# Altium PCB LT-CHARGE+.PcbDoc
Units mm, origin at the board's own origin, x right, y up, seen from the top; angles counter-clockwise.
Board outline 21 x 36.55 mm, 2 copper layers (Top Layer, Bottom Layer); 28 components, 19 nets, 92 pads, 49 vias.
Unrouted connection lines stored in the file: 49.
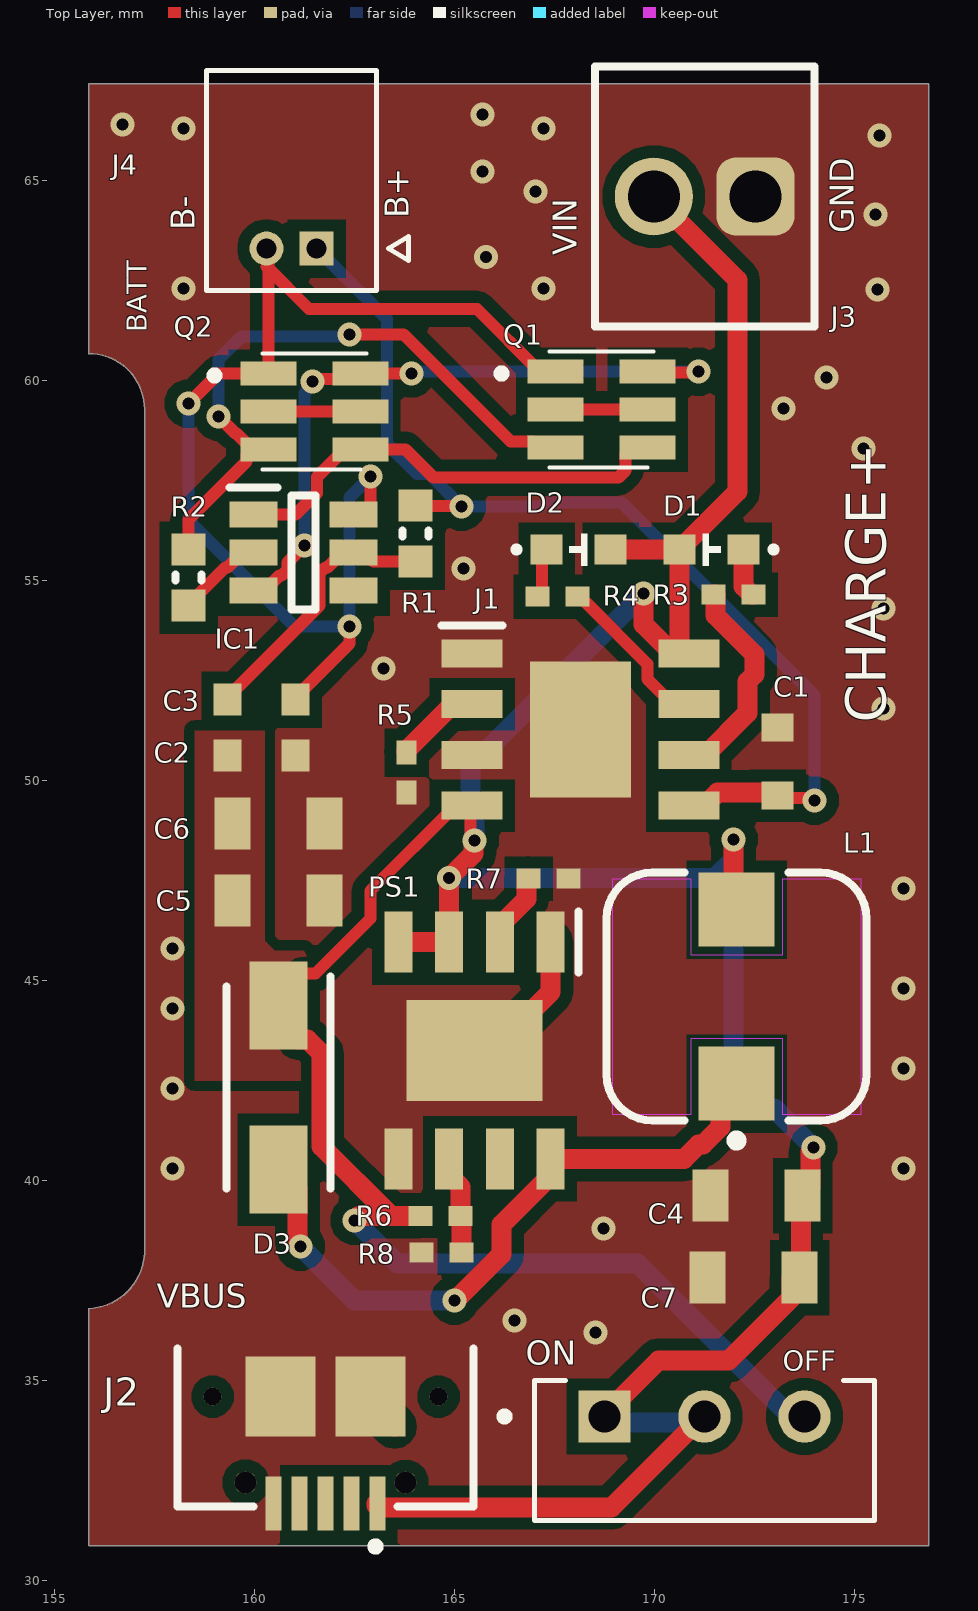
[diagram p0: Top Layer view]
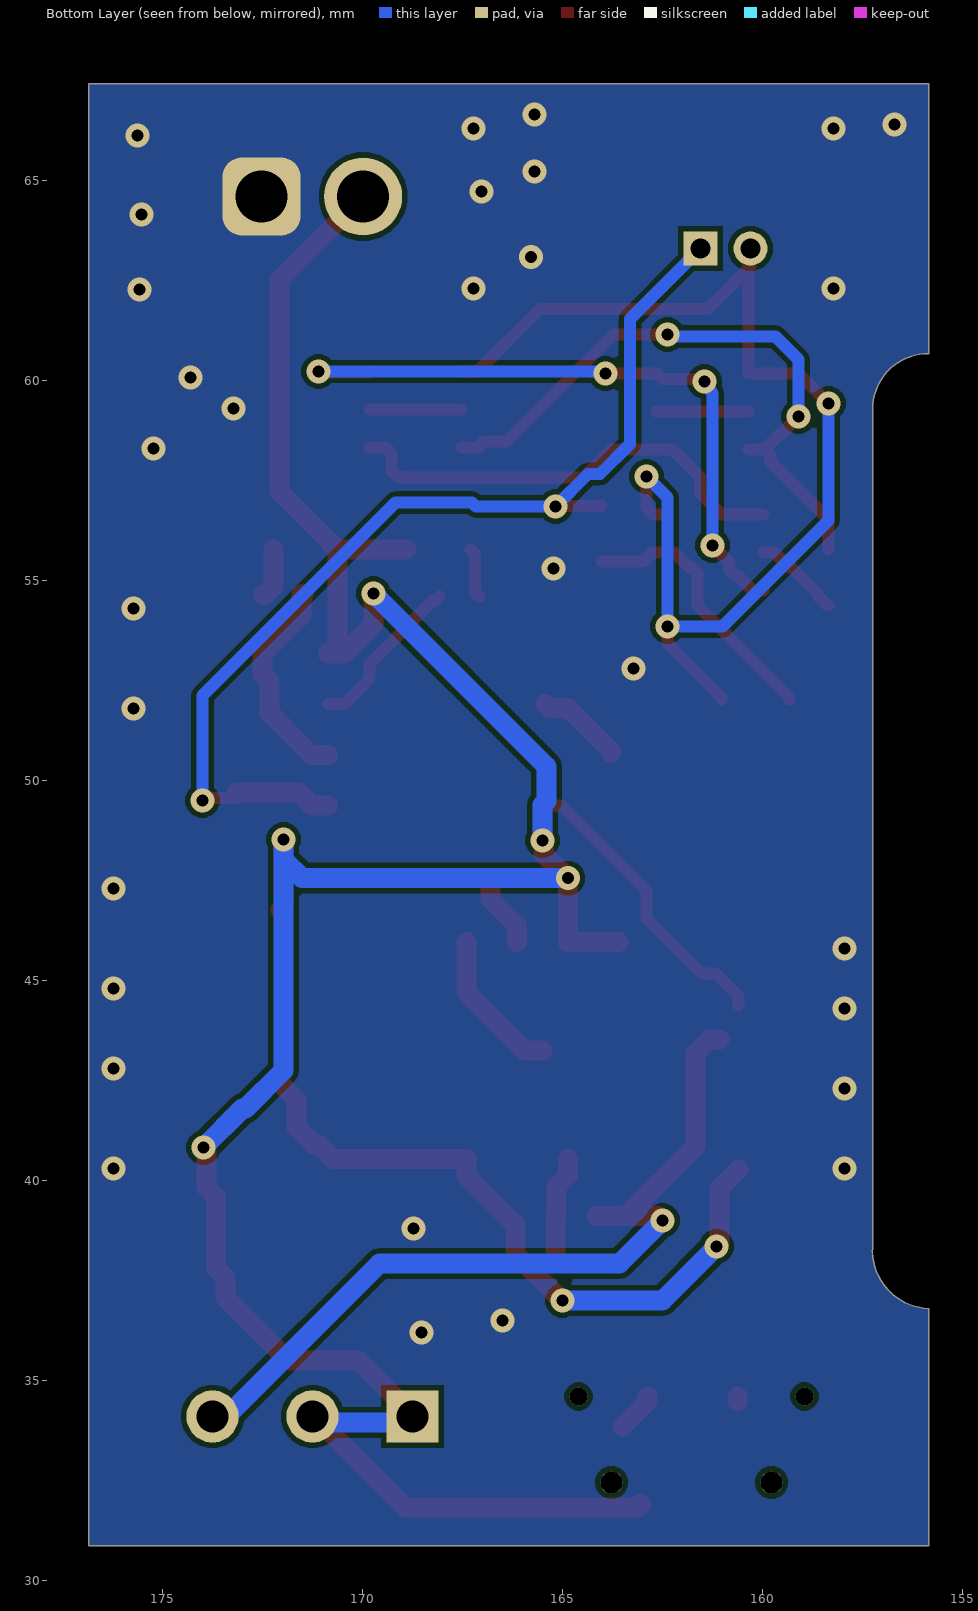
[diagram p1: Bottom Layer view, seen from below]
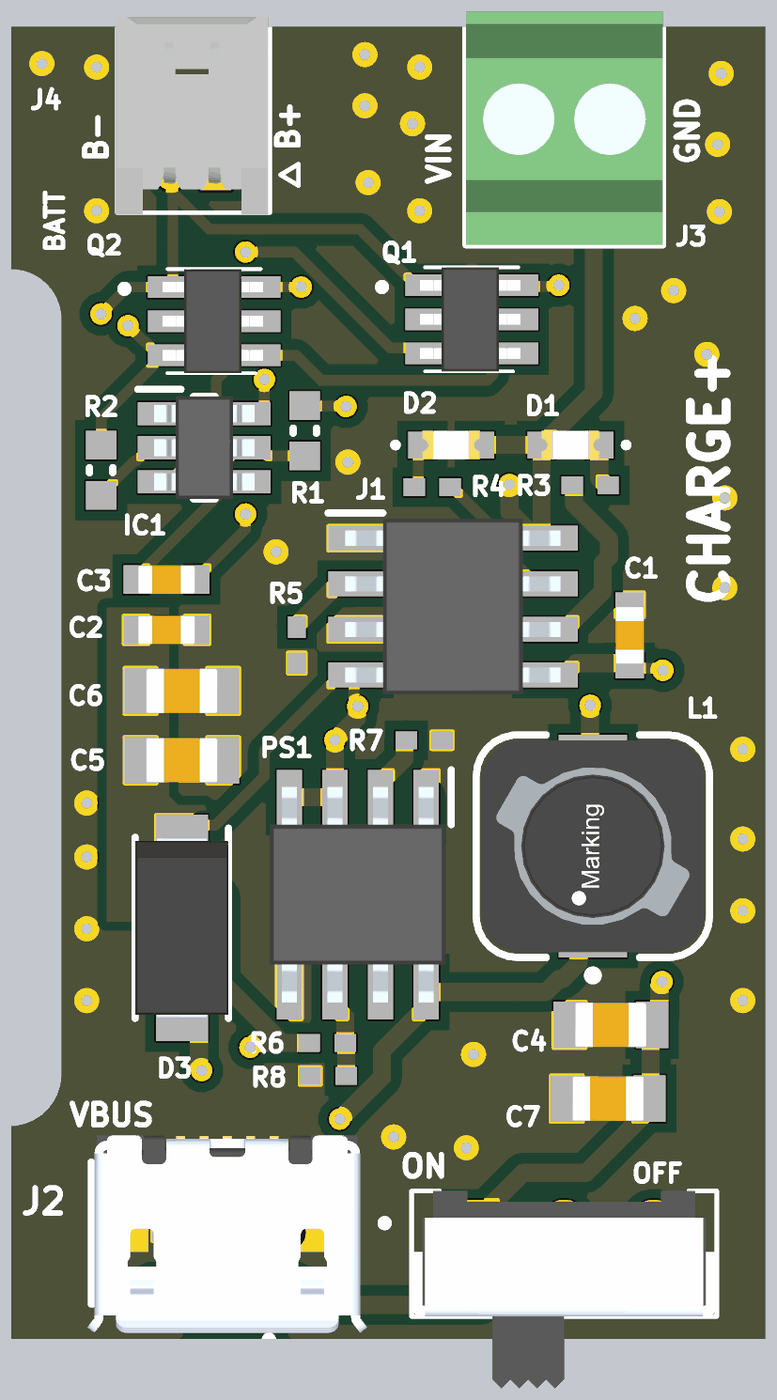
[diagram p2: 3D render of the assembled board from above, using the file's embedded part models]

## Layer stack, top to bottom
Top Solder: solder mask 0.0102, Solder Resist, Dk 3.5
Top Layer: signal copper 0.035
Dielectric 1: dielectric 0.32, FR-4, Dk 4.8
Bottom Layer: signal copper 0.035
Bottom Solder: solder mask 0.0102, Solder Resist, Dk 3.5

## Board outline
155.85,60.675 cw(c155.85,59.275) 157.25,59.275 157.25,38.325 cw(c155.788,38.262) 155.85,36.8 155.85,30.875 176.85,30.875 176.85,67.425 155.85,67.425

## Design rules (kind name [scope] priority, off if disabled: settings)
Clearance Clearance_1 [InNamedPolygon('NONET_L01_P024')] p1: gap=0.5 ignorepadtopadclearanceinfootprint=FALSE
Clearance [InNamedPolygon('+5V_L01_P009')] p2: gap=0.254 ignorepadtopadclearanceinfootprint=FALSE except(0: Arc-Hole Track-Hole SMDPad-Hole THPad-Hole Via-Hole Fill-Hole Poly-Hole Region-Hole Text-Hole)
Clearance GND_L01_P023 [InNamedPolygon('GND_L01_P023')] p3: gap=0.3 ignorepadtopadclearanceinfootprint=FALSE
Clearance "CLEARCE GENERAL" [All] p4: gap=0.127 ignorepadtopadclearanceinfootprint=FALSE
HoleToHoleClearance [All] p1: gap=0.01 allowstackedmicrovias=TRUE
MinimumSolderMaskSliver [All] p1: minsoldermaskwidth=0.05
PlaneClearance [All] p1: clearance=0.108
PlaneConnect [All] p1: planeconnectstyle=Direct reliefexpansion=0.508 reliefentries=4 reliefconductorwidth=0.254 reliefairgap=0.254
PolygonConnect [All] p1: connectstyle=Direct reliefconductorwidth=0.254 reliefentries=4 polygonreliefangle="90 Angle" airgapwidth=0.254
RoutingVias [All] p1: holewidth=0.3 width=0.6 viastyle="Through Hole" minholewidth=0.05 minwidth=0.05 maxholewidth=0.4 maxwidth=0.6
SilkToSilkClearance [All] p1: silktosilkclearance=0.05
SilkToSolderMaskClearance [IsPad] p1: minsilkscreentomaskgap=0.05 clearancetoexposedcopper=TRUE
SolderMaskExpansion [All] p1: expansion=0.05 istentingtop=FALSE
Width [All] p1: maxlimit=1 minlimit=0.254 preferedwidth=0.5
24 further rules are at their usual default settings.

## Components (designator, comment, footprint, x,y, rotation, side; value= is the part's Value field where it differs from the comment)
C1 "10uF" WCAP-CSGP_0603_L1.6W0.8H0.8_WAVE 173.075,50.475 r270 top
C2 "100nF" WCAP-CSGP_0603_L1.6W0.8H0.8_WAVE 160.175,50.625 r180 top
C3 "10uF" WCAP-CSGP_0603_L1.6W0.8H0.8_WAVE 160.175,52.025 r180 top
C4 "22uF" WCAP-CSGP_0805_L2W1.25H0.6_WAVE 172.55,39.625 r0 top
C5 "22uF" WCAP-CSGP_0805_L2W1.25H0.6_WAVE 160.6,46.996 r180 top
C6 "22uF" WCAP-CSGP_0805_L2W1.25H0.6_WAVE 160.6,48.925 r180 top
C7 "22uF" WCAP-CSGP_0805_L2W1.25H0.6_WAVE 172.475,37.571 r0 top
D1 "Green, 3.1V, 120°" WL-SMCD_0603 171.425,55.775 r180 top
D2 "Super Red, 2V, 140°" WL-SMCD_0603 168.1,55.775 r0 top
D3 "SS54" DIOM5026X262N 160.6,42.325 r270 top
IC1 "DW01A-G" SOT95P280X135-6N 161.225,55.7 r0 top
J1 "TP4056" SOIC127P600X175-9N 168.15,51.275 r0 top
J2 "USB3090-XX-X_REVE" GCT_USB3080-XX-01-A_REVE 161.775,34.6 r180 top
J3 "691412220002M" 691210910002 171.255,64.6 r180 top
J4 "691412220002M" MOLEX_530480210 161.55,63.3 r180 top
L1 "inductor33uh" WE-PD_6050R 172.05,44.6 r90 top
OFF "EG1270" SW_EG1270 171.25,34.1 r0 top (schematic designator S1)
PS1 "FP6298XR-G1" SOIC127P600X175-9N 165.5,43.25 r270 top
Q1 "FS8205" FS8205 168.025,59.275 r0 top
Q2 "FS8205" FS8205 160.85,59.225 r0 top
R1 "ERA-3ARW103V" 0603L 164.025,56.175 r90 top value=10.0k
R2 "ERA-3ARW103V" 0603L 158.35,55.075 r270 top value=10.0k
R3 "CRCW0402510RJNED" 0402L 171.975,54.65 r0 top value=1K5
R4 "CRCW0402510RJNED" 0402L 167.575,54.6 r180 top value=1K5
R5 "CRCW0402510RJNED" 0402L 163.8,50.2 r90 top value=510
R6 "CRCW0402510RJNED" 0402L 164.65,39.116 r180 top value=75k
R7 "CRCW0402510RJNED" 0402L 167.35,47.55 r180 top value=27k
R8 "CRCW0402510RJNED" 0402L 164.675,38.2 r0 top value=10k

## Footprints (in the part's own frame and the unit in brackets; to place one, negate y for a bottom-side part, rotate by r counter-clockwise, add the part's x,y. Pads: shape width x height; smd on the part's side, far side on the other; paste and mask are expansions set on the pad)
0402L [mm]
  rect 0.6x0.5 smd: 1(-0.5,0) 2(0.5,0)
  body extent -0.55,-0.3 0.55,0.3, height 0.6
0603L [mm]
  rect 0.8x0.85 smd: 1(-0.7,0) 2(0.7,0)
  silkscreen extent -0.07,-0.32 0.07,0.32, body extent -0.87,-0.47 0.87,0.47, height 1
691210910002 [mm] "2,54mm - modular - green - Horizontal wire entry - Cage clamp - 0,8mm2 wires - 02p"
  rrect50% 1.95x1.95 hole 1.3: 1(-1.27,0)
  round 1.95 hole 1.3: 2(1.27,0)
  silkscreen extent -2.74,-3.25 2.74,3.25, body extent -2.74,-3.25 2.74,3.25, height 8.55
DIOM5026X262N [mm]
  rect 2.2x1.45 smd: 1(-2.05,0) 2(2.05,0)
  silkscreen extent -2.78,-1.3 2.52,1.3, body extent -2.52,-1.3 2.52,1.3, height 2.62
FS8205 [mm]
  rect 1.4x0.6 smd: 1(-0.5,0.95) 2(-0.5,0) 3(-0.5,-0.95) 4(1.8,0.95) 5(1.8,0) 6(1.8,-0.95)
  silkscreen extent -1.95,-1.45 1.95,1.45, body extent -0.79,-1.45 2.01,1.45, height 1.46
GCT_USB3080-XX-01-A_REVE [mm]
  rect 0.4x1.35 smd: 1(-1.3,2.68) 2(-0.65,2.68) 3(0,2.68) 4(0.65,2.68) 5(1.3,2.68)
  rect 1.75x2 smd: 8(-1.125,0) 9(1.125,0)
  round 0.45 hole 0.45 unplated: ""(-2.825,0) ""(2.825,0)
  round 0.55 hole 0.55 unplated: ""(-2,2.15) ""(2,2.15)
  silkscreen extent -3.7,-1.2 3.7,3.85, body extent -3.99,-1.94 3.81,3.56, height 2.71
MOLEX_530480210 [mm]
  rect 0.85x0.85 / inner round 0.85 / far side rect 0.85x0.85 hole 0.5 mask+0.076: 1(0,0)
  round 0.85 hole 0.5 mask+0.076: 2(1.25,0)
  silkscreen extent -2.3,-4.45 2.75,1.05, body extent -1.46,-4.4 2.79,1.1, height 3.63
SOIC127P600X175-9N [mm]
  rect 1.525x0.7 smd: 1(-2.712,1.905) 2(-2.712,0.635) 3(-2.712,-0.635) 4(-2.712,-1.905) 5(2.712,-1.905) 6(2.712,-0.635) 7(2.712,0.635) 8(2.712,1.905)
  rect 2.513x3.402 smd: 9(0,0)
  silkscreen extent -3.47,2.61 -1.95,2.61, body extent -3,-2.45 3,2.45, height 1.75
SOT95P280X135-6N [mm]
  rect 1.2x0.65 smd: 1(-1.25,0.95) 2(-1.25,0) 3(-1.25,-0.95) 4(1.25,-0.95) 5(1.25,0) 6(1.25,0.95)
  silkscreen extent -1.85,-1.43 0.3,1.63, body extent -1.4,-1.43 1.4,1.43, height 1.35
SW_EG1270 [mm]
  rect 1.308x1.308 / inner round 1.308 / far side rect 1.308x1.308 hole 0.8: 1(-2.5,0)
  round 1.308 hole 0.8: 2(0,0) 3(2.5,0)
  silkscreen extent -5.1,-2.6 4.25,0.9, body extent -4.25,-4.6 4.25,0.9, height 5.1
WCAP-CSGP_0603_L1.6W0.8H0.8_WAVE [mm] "Ceramic Capacitors, 0603, body 1.6x0.8mm"
  rect 0.7x0.8 smd: 1(-0.85,0) 2(0.85,0)
  body extent -0.8,-0.4 0.8,0.4, height 0.8
WCAP-CSGP_0805_L2W1.25H0.6_WAVE [mm] "Ceramic Capacitors, body 2x1.25mm"
  rect 0.9x1.3 smd: 1(-1.15,0) 2(1.15,0)
  body extent -1,-0.62 1,0.63, height 0.6
WE-PD_6050R [mm] "SMT Shielded Power Inductor, 2-leads, body 5.9x6.2mm"
  rect 1.85x1.9 smd: 1(-2.175,0) 2(2.175,0)
  Top Layer keep-out region: -2.95,-3.1 -2.95,-1.15 -1.05,-1.15 -1.05,1.15 -2.95,1.15 -2.95,3.1 2.95,3.1 2.95,1.15 1.05,1.15 1.05,-1.15 2.95,-1.15 2.95,-3.1
  silkscreen extent -3.72,-3.25 3.1,3.25, body extent -2.95,-3.1 2.95,3.1, height 4.9
WL-SMCD_0603 [mm] "SMD Mono-color Chip LED, body 1.6x0.8mm"
  rect 0.8x0.75 smd: 1(-0.8,0) 2(0.8,0)
  silkscreen extent -1.63,-0.4 0.22,0.4, body extent -0.8,-0.4 0.8,0.4, height 0.42

## Part data
C1 C2 C3: library part C, "WCAP-CSGP Multilayer Ceramic Chip Capacitor, General Purpose, size 0201, NP0 Class I, 100pF, 25VDC", Capacitance=100pF, Capacitance Tolerance=+/-5%, Case/Size Code=0201, Insulation Resistance=10GΩ, Manufacturer="Wurth Elektronik", Manufacturer Part Number=885012004001, Operating Temperature Max=125°C, Operating Temperature Min=-55°C, Rated Voltage (DC)=25V, Category="Multilayer Ceramic Chip Capacitors", Ceramic Type="NP0 Class I", ComponentLink1Description="Website Link", ComponentLink1URL=https://www.we-online.com/redexpert/article/885012004001?ad, ComponentLink2Description="Datasheet Link", ComponentLink2URL=https://www.we-online.com/redexpert/spec/885012004001?ad, Height=0.3mm, Length=0.6mm, Match Code=WCAP-CSGP, Mount="Surface Mount", Packaging="Tape and Reel", Q Factor=1000, Technical Reference=NP00201101J025DFCT10000, Width=0.3mm
C4 C5 C6 C7: library part C-08, "WCAP-CSGP Multilayer Ceramic Chip Capacitor, General Purpose, size 0201, NP0 Class I, 10pF, 50VDC", Capacitance=10pF, Capacitance Tolerance=+/-5%, Case/Size Code=0201, Insulation Resistance=10GΩ, Manufacturer="Wurth Elektronik", Manufacturer Part Number=885012004011, Operating Temperature Max=125°C, Operating Temperature Min=-55°C, Rated Voltage (DC)=50V, Category="Multilayer Ceramic Chip Capacitors", Ceramic Type="NP0 Class I", ComponentLink1Description="Website Link", ComponentLink1URL=https://www.we-online.com/redexpert/article/885012004011?ad, ComponentLink2Description="Datasheet Link", ComponentLink2URL=https://www.we-online.com/redexpert/spec/885012004011?ad, Height=0.3mm, Length=0.6mm, Match Code=WCAP-CSGP, Mount="Surface Mount", Packaging="Tape and Reel", Q Factor=600, Technical Reference=NP00201100J050DFCT10000, Width=0.3mm
D1: library part led-green, "WL-SMSW Mono-color Side View Waterclear, size 3014, Green, 3.1V, 120°", Case/Size Code=3014, Emitting Color=Green, Forward Voltage=3.1V, Manufacturer="Wurth Elektronik", Manufacturer Part Number=155301GS73100, Operating Temperature Max=85°C, Operating Temperature Min=-40°C, Category="Signal LEDs", Chip Technology=InGaN, ComponentLink1Description="Website Link", ComponentLink1URL=https://www.we-online.com/redexpert/article/155301GS73100?ad, ComponentLink2Description="Datasheet Link", ComponentLink2URL=https://www.we-online.com/redexpert/spec/155301GS73100?ad, Dominant Wavelength=525nm, Height=1.55mm, Length=3mm, Luminous Intensity=1500mcd, Match Code=WL-SMSW, Mount="Surface Mount", Packaging="Tape and Reel", Peak Wavelength=515nm, Viewing Angle=120°, Width=1.38mm
D2: library part led-red, "WL-SMCD Mono-color Chip LED Diffused, SMT, size 0603, Super Red, 2V, 140°", Case/Size Code=0603, Emitting Color="Super Red", Forward Voltage=2V, Manufacturer="Wurth Elektronik", Manufacturer Part Number=150060SS55040, Operating Temperature Max=85°C, Operating Temperature Min=-40°C, Category="Signal LEDs", Chip Technology=AlInGaP, ComponentLink1Description="Website Link", ComponentLink1URL=https://www.we-online.com/redexpert/article/150060SS55040?ad, ComponentLink2Description="Datasheet Link", ComponentLink2URL=https://www.we-online.com/redexpert/spec/150060SS55040?ad, Dominant Wavelength=630nm, Height=0.4mm, Length=1.6mm, Luminous Intensity=70mcd, Match Code=WL-SMCD, Mount="Surface Mount", Packaging="Tape and Reel", Peak Wavelength=645nm, Viewing Angle=140°, Width=0.8mm
D3: "Schottky Diode", Manufacturer_Name="DIYI Elec Tech", Datasheet Link=https://datasheet.lcsc.com/szlcsc/DIYI-Elec-Tech-SS54_C84165.pdf, Height=2.62mm, Manufacturer_Part_Number=SS54
IC1: "Integrated Circuit", Manufacturer_Name="Fortune Semiconductor Corporation", Datasheet Link=http://acoptex.com/uploads/DW01A.pdf, Height=1.35mm, Manufacturer_Part_Number=DW01A-G
J1: "Connector", Manufacturer_Name="NanJing Top Power", Datasheet Link=https://dlnmh9ip6v2uc.cloudfront.net/datasheets/Prototyping/TP4056.pdf, Height=1.75mm, Manufacturer_Part_Number=TP4056
J2: "Micro USB Receptacle, Type AB, SMT, R/A, Bottom Mount, w/out Peg, w/outer shell stakes", Package=None, Availability=Unavailable, MP=USB3090-XX-X_REVE, Price=None
J3: library part conn, "WR-TBL Series 4122M 45° Entry, THT, pitch 7mm, 2p", Manufacturer="Wurth Elektronik", Operating Temperature Max=120°C, Operating Temperature Min=-30°C, Rated Current=4A, Working Voltage=300V, Application=Screwless, Category="Terminal Blocks", ComponentLink1Description="Website Link", ComponentLink1URL=https://www.we-online.com/redexpert/article/691412220002M?ad, ComponentLink2Description="Datasheet Link", ComponentLink2URL=https://www.we-online.com/redexpert/spec/691412220002M?ad, Manufacturer Part Number=691412220002M, Match Code=WR-TBL, Modularity=No, Mount="Through Hole", Number of Pins=2, Number of Rows=1, Orientation=45°, Packaging=Box, Pitch=7mm
J4: library part header, "WR-TBL Series 4122M 45° Entry, THT, pitch 7mm, 2p", Manufacturer="Wurth Elektronik", Operating Temperature Max=120°C, Operating Temperature Min=-30°C, Rated Current=4A, Working Voltage=300V, Application=Screwless, Category="Terminal Blocks", ComponentLink1Description="Website Link", ComponentLink1URL=https://www.we-online.com/redexpert/article/691412220002M?ad, ComponentLink2Description="Datasheet Link", ComponentLink2URL=https://www.we-online.com/redexpert/spec/691412220002M?ad, Manufacturer Part Number=691412220002M, Match Code=WR-TBL, Modularity=No, Mount="Through Hole", Number of Pins=2, Number of Rows=1, Orientation=45°, Packaging=Box, Pitch=7mm
L1: "33 ÂµH Shielded Drum Core, Wirewound Inductor 3 A 60mOhm Max Nonstandard", Package="Nonstandard Bourns", Availability="Not in stock", Check_prices=https://www.snapeda.com/parts/SRR1260-330M/Bourns/view-part/?ref=eda, MF=Bourns, MP=SRR1260-330M, Price=None, SnapEDA_Link=https://www.snapeda.com/parts/SRR1260-330M/Bourns/view-part/?ref=snap
OFF: "Slide Switch SPDT Through Hole, Right Angle", Package=None, Availability="In Stock", Check_prices=https://www.snapeda.com/parts/EG1270/E-Switch/view-part/?ref=eda, MF=E-Switch, MP=EG1270, Price=None, Purchase-URL=https://pricing.snapeda.com/search/part/EG1270/?ref=eda, SnapEDA_Link=https://www.snapeda.com/parts/EG1270/E-Switch/view-part/?ref=snap
PS1: "Power Supply", Manufacturer_Name="Feeling Technology", Datasheet Link=https://datasheet.lcsc.com/szlcsc/1811141821_Feeling-Tech-FP6298XR-G1_C88319.pdf, Height=1.752mm, Manufacturer_Part_Number=FP6298XR-G1
Q1 Q2: "Dual N-Channel Enhancement Mode Power MOSFET", Package=Package, Availability="Not in stock", Check_prices=https://www.snapeda.com/parts/FS8205/Fortune+Semiconductor/view-part/?ref=eda, MF="Fortune Semiconductor", MP=FS8205, Price=None, SnapEDA_Link=https://www.snapeda.com/parts/FS8205/Fortune+Semiconductor/view-part/?ref=snap
R1: library part RES-10K-0603, "RES, 10.0 k, 0.05%, 0.1 W, AEC-Q200 Grade 0, 0603", Manufacturer=Panasonic, Power_W=100mW, TempCo="10 ppm/C", Tolerance_%=0.05%, Value2=0.1W, Value_Code=10k0, ValueDisplayed=100R, AEC Category=Q200, AEC Grade=0, AEC Qualified=Y, ComponentLink1Description="Datasheet link", ComponentLink1URL=https://industrial.panasonic.com/cdbs/www-data/pdf/RDM0000/AOA0000C307.pdf, CompType=Resistor, MountType=SMT, PackageReference=0603, PartNumber=ERA-3ARW103V, Res_ohm=10k, RoHS=Y, SizeArea_mm2=1.28, SizeAreaWB_mm2=4.68, SizeX_mm=1.6, SizeY_mm=0.8, SizeZ_mm=1, Technology="Thin Film", Value1=0.05%
R2: library part RES-10K-0603, "RES, 10.0 k, 0.05%, 0.1 W, AEC-Q200 Grade 0, 0603", Manufacturer=Panasonic, Power_W=100mW, TempCo="10 ppm/C", Tolerance_%=0.05%, Value2=0.1W, Value_Code=10k0, ValueDisplayed=1k, AEC Category=Q200, AEC Grade=0, AEC Qualified=Y, ComponentLink1Description="Datasheet link", ComponentLink1URL=https://industrial.panasonic.com/cdbs/www-data/pdf/RDM0000/AOA0000C307.pdf, CompType=Resistor, MountType=SMT, PackageReference=0603, PartNumber=ERA-3ARW103V, Res_ohm=10k, RoHS=Y, SizeArea_mm2=1.28, SizeAreaWB_mm2=4.68, SizeX_mm=1.6, SizeY_mm=0.8, SizeZ_mm=1, Technology="Thin Film", Value1=0.05%
R3 R4 R5 R6 R7 R8: "RES, 510, 5%, 0.063 W, 0402", Manufacturer=Vishay-Dale, Power_W=0.063, Supplier Part Number 1=541-510JCT-ND, TempCo="200 ppm/C", Tolerance_%=5, Value1=5%, Value2=0.063W, Value_Code=510R, ValueDisplayed=510, ComponentLink1Description="Datasheet link", ComponentLink1URL=http://www.vishay.com/docs/20035/dcrcwe3.pdf, CompType=Resistor, EIA_Code=E24, LatestRevisionDate=2015-05-27, MountType=SMT, PackageReference=0402, PartNumber=CRCW0402510RJNED, Published=2008-06-26, Publisher="Texas Instruments", Res_ohm=510, RoHS=Y, Supplier 1=Digi-Key, Supplier 2=Mouser, Supplier 3=Farnell, Supplier Part Number 2=71-CRCW0402J-510-E3, Supplier Part Number 3=1570682, SymbolVersion=2009-05-29, Technology="Thick Film", U/M=EA, VDC_V=50

## Via types
v1: diameter 0.6, hole 0.3, Top Layer to Bottom Layer, 49 vias

## Nets (pads, with @x,y where several pads share a name; then routed paths per layer and width w, separated by ;. In a path a pad name is that pad's centre, name@x,y a point inside that pad or via, vN(x,y) a via of type N, cw(c..) or ccw(c..) an arc to the next point about the centre after c; other vN are vias at no path point)
+5V: C2.2 C4.2 C5.2 C6.2 C7.2 D1.2 D2.2 D3.1 J1.4 J1.8 J2.1 J3.2 L1.2 OFF.1 OFF.2 OFF.3 PS1.3 PS1.4 R6.2 | length 96.9
  Top Layer w0.3: D3.1 160.6,44.604 161.175,45.179 161.529,45.179 162.895,46.546 162.895,47.239 165.026,49.37 J1.4 165.438,49.308 165.4,49.27 165.4,48.627 165.5,48.527 v1(165.5,48.5)
  Top Layer w0.5: D3.1@161.075,43.525 161.325,43.525 161.675,43.175 161.675,40.851 163.409,39.116 ; v1(162.5,39) 162.616,39.116 163.409,39.116 ; J2.1@163.05,31.92 163.05,31.875 163.1,31.825 168.925,31.825 OFF.2@171.05,33.95 ; PS1.4 PS1.3 v1(164.865,47.56) 165.481,48.176 165.481,48.481 v1(165.5,48.5) ; R6.2 163.409,39.116 ; OFF.1@168.55,33.95 170.1,35.5 171.855,35.5 173.425,37.07 173.425,37.575 173.663,37.812 173.663,39.588 173.9,39.825 173.9,40.723 173.975,40.798 v1(173.975,40.825) ; D2.2 D1.2 ; v1(169.725,54.675) 169.725,53.905 170.45,53.18 J1.8@170.725,53.18 ; J3.2 172.075,62.51 172.075,57.225 170.775,55.925 170.775,55.9 170.65,55.775 D1.2 ; J1.8 J1.8@170.725,53.18 ; v1(171.975,48.525) 171.975,46.85 L1.2 ; D1.2 170.625,53.28 J1.8@170.725,53.18
  Bottom Layer w0.5: v1(162.5,39) 163.575,37.925 169.575,37.925 OFF.3@173.55,33.95 ; v1(164.865,47.56) 171.508,47.56 171.975,48.027 ; v1(165.5,48.5) 165.5,49.389 165.4,49.489 165.4,50.35 v1(169.725,54.675) ; OFF.1@168.55,33.95 OFF.2@171.05,33.95 ; v1(171.975,48.525) 171.975,48.027 ; v1(173.975,40.825) 173.003,41.797 172.928,41.797 171.975,42.75 171.975,48.027
B+: C1.2 J1.5 J4.1 R1.2 | length 26.2
  Top Layer w0.3: R1.2 164.038,56.862 165.163,56.862 v1(165.175,56.85) ; C1.2 173.143,49.557 173.943,49.557 v1(174,49.5)
  Top Layer w0.5: J1.5 171.275,49.37 171.375,49.47 171.375,49.495 171.58,49.7 C1.2@173.143,49.7
  Bottom Layer w0.3: J4.1 163.313,61.537 163.313,58.412 164.065,57.66 164.365,57.66 v1(165.175,56.85) 167.166,56.85 167.266,56.95 169.175,56.95 174,52.125 v1(174,49.5)
B-: C3.1 IC1.6 J4.2 Q1.1 Q2.1 | length 29.4
  Top Layer w0.3: v1(158.35,59.425) 159.1,60.175 Q2.1 160.35,62.85 160.35,63.25 J4.2 ; 160.3,62.85 161.365,61.785 165.565,61.785 167.125,60.225 Q1.1 ; C3.1 161.025,52.075 162.375,53.425 v1(162.375,53.85) ; IC1.6 162.725,56.65 162.9,56.825 v1(162.9,57.6)
  Bottom Layer w0.3: v1(158.35,59.425) 158.35,56.5 161,53.85 v1(162.375,53.85) 162.375,57.075 v1(162.9,57.6)
GND: C1.1 C2.1 C4.1 C5.1 C6.1 C7.1 J1.1 J1.3 J1.9 J2.5 J2.8 J2.9 J3.1 PS1.1 PS1.5 PS1.9 R5.1 R7.1 R8.1 | length 4.9
  Top Layer w0.5: J2.9@160.625,34.475 J2.9@160.625,34.6 ; J2.8@162.875,34.6 162.875,34.475 J2.8@163.5,33.85 ; PS1.9 165.945,43.25 167.405,44.711 PS1.1
  other v1: 168.525,36.2 166.5,36.5 168.725,38.8 157.95,40.3 176.225,40.3 157.95,42.3 176.225,42.8 157.95,44.3 176.225,44.8 157.95,45.8 176.225,47.3 175.725,51.8 163.225,52.8 175.725,54.3 165.225,55.3 175.225,58.3 173.225,59.3 174.3,60.075 175.575,62.275 158.225,62.3 167.225,62.3 165.79,63.085 175.525,64.15 167.025,64.725 165.7,65.225 175.625,66.125 158.225,66.3 167.225,66.3 156.7,66.4 165.7,66.65
NetC3_2: C3.2 IC1.5 R1.1 | length 6.8
  Top Layer w0.3: C3.2 159.325,52.075 161.625,54.375 161.625,55.179 161.771,55.325 161.825,55.325 162.2,55.7 IC1.5 162.75,55.7 162.975,55.475 R1.1
NetD1_1: D1.1 R3.2 | length 1.3
  Top Layer w0.5: D1.1 172.225,54.85 172.425,54.65 R3.2
NetD2_1: D2.1 R4.2 | length 1.3
  Top Layer w0.3: R4.2 167.087,54.6 167.187,54.7 167.187,55.663 D2.1
NetD3_2: D3.2 L1.1 PS1.8 | length 16.9
  Top Layer w0.5: D3.2 161.075,39.8 161.075,38.425 v1(161.15,38.35) ; v1(165,37) 165.02,37 166.174,38.154 166.174,38.894 167.405,40.126 PS1.8 170.738,40.538 171.1,40.9 171.211,40.9 171.65,41.339 171.65,42.025 L1.1
  Bottom Layer w0.5: v1(161.15,38.35) 162.5,37 v1(165,37)
NetIC1_1: IC1.1 Q1.6 Q2.6 | length 11.6
  Top Layer w0.3: IC1.1 161.025,56.65 161.562,57.188 161.562,57.587 162.25,58.275 Q2.6 163.775,58.275 164.475,57.575 169.099,57.575 169.275,57.751 169.275,58.175 169.425,58.325 Q1.6
NetIC1_2: IC1.2 R2.2 | length 2.2
  Top Layer w0.3: R2.2 158.375,54.375 158.625,54.625 158.625,54.679 159.271,55.325 159.325,55.325 159.7,55.7 IC1.2
NetIC1_3: IC1.3 Q1.4 Q2.4 | length 17.1
  Top Layer w0.3: IC1.3 160.25,54.75 160.625,55.125 160.679,55.125 160.825,55.271 160.825,55.45 v1(161.25,55.875) ; v1(161.45,59.975) 161.507,60.032 162.507,60.032 Q2.4 v1(163.925,60.175) ; Q1.4 169.85,60.2 171.075,60.2 v1(171.1,60.225)
  Bottom Layer w0.3: v1(161.25,55.875) 161.25,59.694 161.45,59.894 v1(161.45,59.975) ; v1(163.925,60.175) 163.975,60.225 v1(171.1,60.225)
NetJ1_2: J1.2 R5.2 | length 2.2
  Top Layer w0.5: R5.2 163.8,50.75 164.86,51.81 165.338,51.81 J1.2
NetJ1_6: J1.6 R3.1 | length 5.4
  Top Layer w0.5: J1.6 171.275,50.64 172.325,51.691 172.325,52.474 172.5,52.649 172.5,53.149 171.525,54.124 171.525,54.65 R3.1
NetJ1_7: J1.7 R4.1 | length 4.1
  Top Layer w0.3: R4.1 168.175,54.5 168.236,54.5 169.825,52.911 169.825,52.534 170.45,51.91 J1.7
NetPS1_2: PS1.2 R7.2 | length 1.9
  Top Layer w0.5: PS1.2 166.135,46.375 166.8,47.039 166.8,47.55 R7.2
NetPS1_6: PS1.6 R6.1 R8.2 | length 2.5
  Top Layer w0.5: PS1.6 164.865,40.126 165.155,39.835 165.155,39.116 165.175,39.116 R8.2
NetQ1_2: Q1.2 Q1.5 | length 2.3
  Top Layer w0.3: Q1.2 Q1.5
NetQ1_3: Q1.3 Q2.3 R2.1 | length 16.1
  Top Layer w0.3: R2.1 158.35,56.525 159.8,57.975 159.8,58.125 Q2.3@159.95,58.275 ; v1(159.1,59.1) 159.525,58.675 159.55,58.675 Q2.3@159.95,58.275 ; Q2.3 Q2.3@159.95,58.275 ; v1(162.375,61.15) 163.728,61.15 166.403,58.475 166.975,58.475 167.075,58.375 167.075,58.325 Q1.3
  Bottom Layer w0.3: v1(159.1,59.1) 159.1,60.525 159.675,61.1 162.325,61.1 v1(162.375,61.15)
NetQ2_2: Q2.2 Q2.5 | length 2.3
  Top Layer w0.3: Q2.2 Q2.5
pads on no net: IC1.4 J2. J2.2 J2.3 J2.4 PS1.7

## Polygon pours and split planes (outlines as drawn)
GND on Top Layer "GND_L01_P023" (solid, pour order 23): 155.85,60.675 cw(c155.85,59.275) 157.25,59.275 157.25,38.325 cw(c155.788,38.262) 155.85,36.8 155.85,30.875 176.85,30.875 176.85,67.425 155.85,67.425
+5V on Top Layer "+5V_L01_P009" (solid, pour order 9): 158.5,51.25 160.25,51.25 160.25,46 160.5,45.75 162,45.75 162,42.5 158.5,42.5
GND on Bottom Layer "GND_L02_P024" (solid, pour order 24): 155.85,60.675 cw(c155.85,59.275) 157.25,59.275 157.25,38.325 cw(c155.788,38.262) 155.85,36.8 155.85,30.875 176.85,30.875 176.85,67.425 155.85,67.425

## Silkscreen, mask and mechanical layers (free items; w line width, h text height)
Top Overlay:
  text "B+" at 163.85,64.05 h0.6 r90
  text "B-" at 158.5,63.75 h0.6 r90
  text "GND" at 174.975,63.675 h0.6 r90
  text "VIN" at 168.05,63.125 h0.6 r90
  text "BATT" at 157.3,61.209 h0.5 r90
  text "CHARGE+" at 175.775,51.443 h1 r90
  text "VBUS" at 157.55,36.825 h0.6
  text "ON" at 166.775,35.4 h0.6

## Text inside footprints (layer, text, board x,y; h text height)
J2: Mechanical 13 "PCB Edge" at 167.501,37.145 h0.67 r180